# EAGLE board MoxonCircuitBoard_v7 (EAGLE 9.7.0)
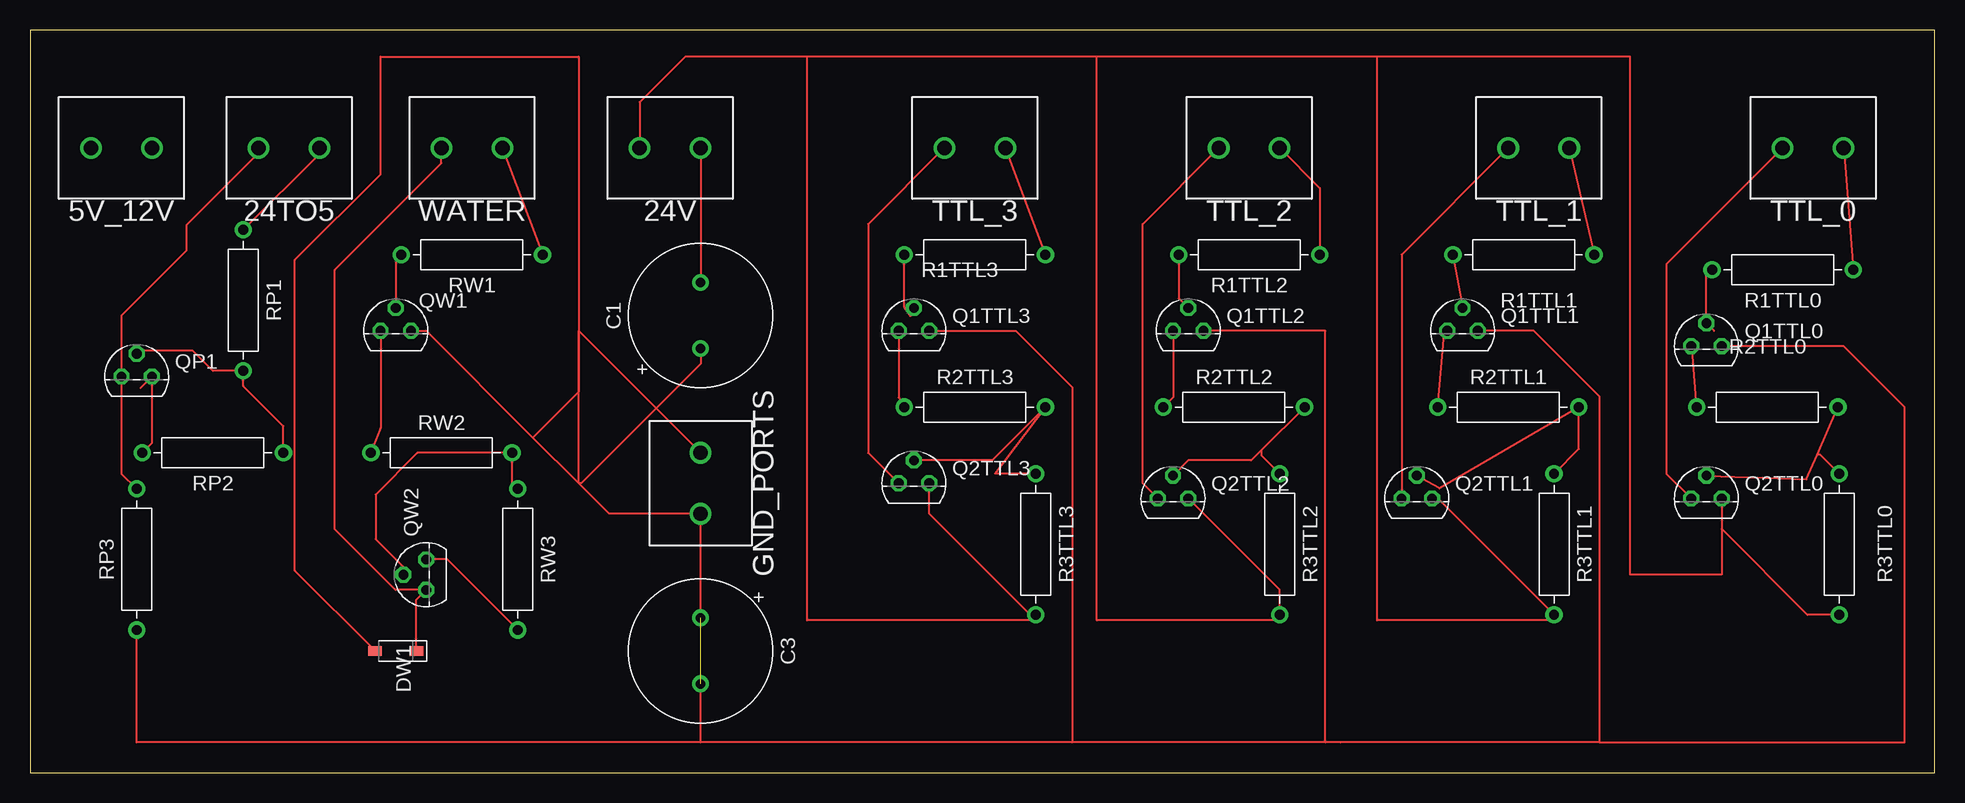
[diagram p0: board, top side]
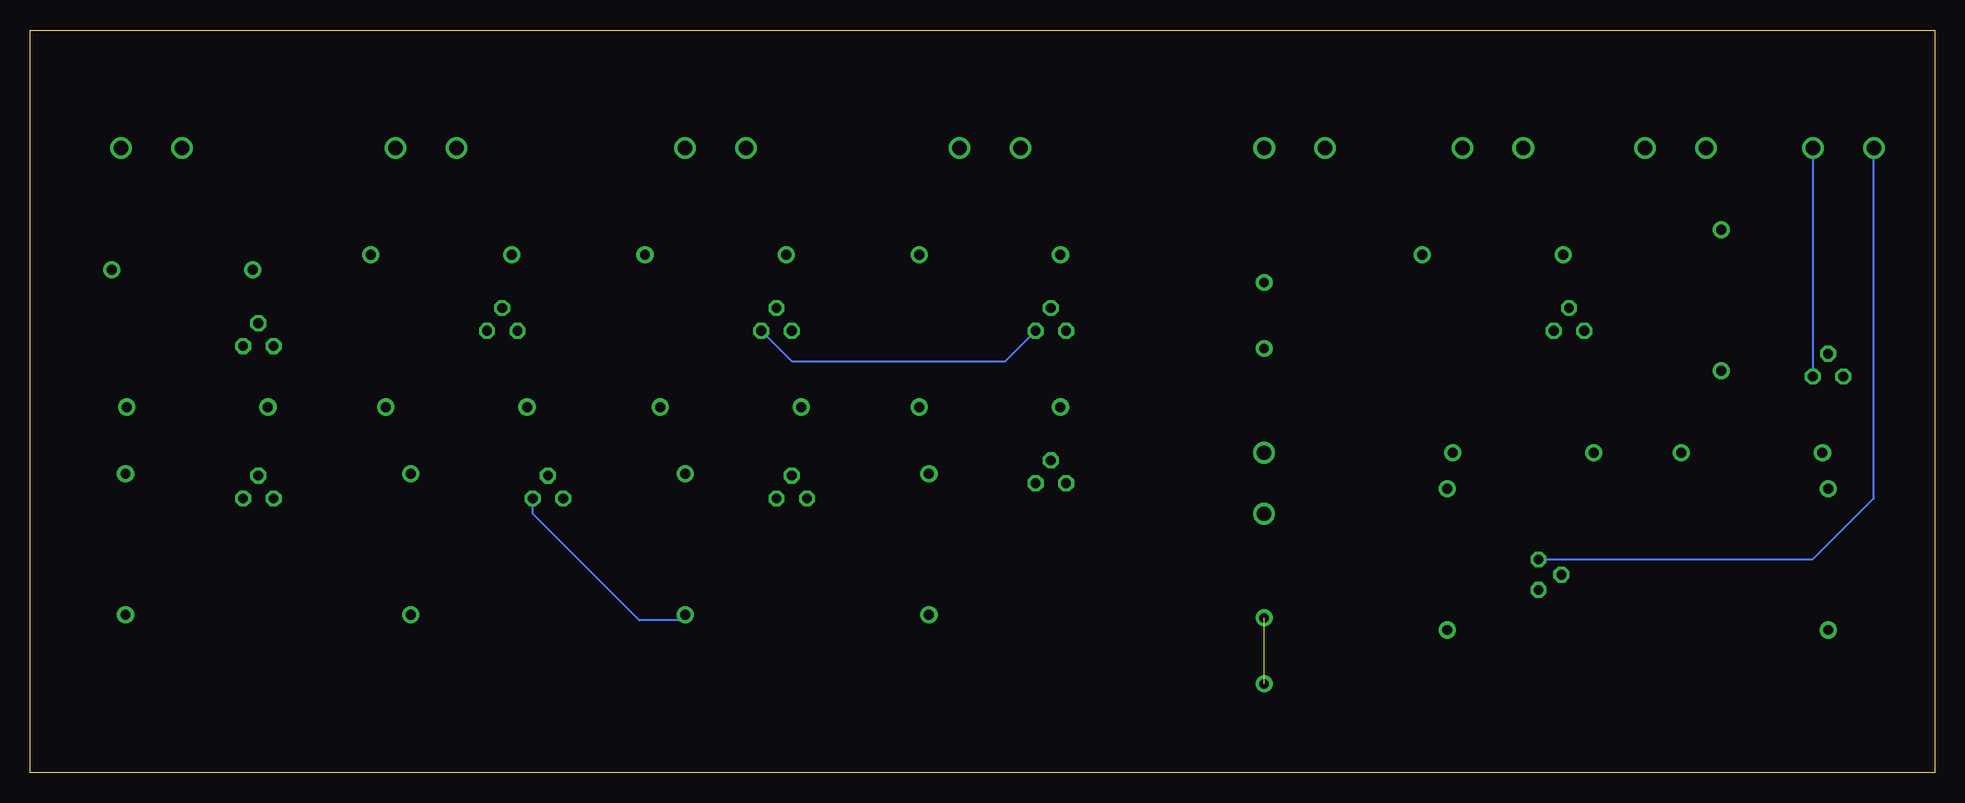
[diagram p1: board, bottom side, seen from below]

Size 158.73 x 61.9 mm. Coordinates in mm from the lower left corner, seen from the top.
Outline: 0,0 158.73,0 158.73,61.9 0,61.9 0,0
Copper layers (1*16): Top 0.035mm / dielectric 1.5mm / Bottom 0.035mm
Design rules "default": minimum track width 6mil, minimum drill 0.35mm, track to track 6mil, track to pad 6mil, pad to pad 6mil, via to via 6mil, smd to smd 6mil, copper to edge 40mil, drill to drill 6mil, minimum pad ring 10mil, minimum via ring 8mil, stop-mask expansion 4mil, vias tented up to drill 0mil, thermal gap 10mil

## Footprints (pad centres in the part's own frame; a part is rotated, then mirrored left to right if it is on the bottom)
TERMBLK_508-2N = drill 1.2: 1 0,0; 2 5.08,0
CAPPRD550W60D1200H2000B = drill 0.8 pad 1.4: 1 -2.75,0; 2 2.75,0
SOD3715X135 = smd 1.127 x 0.784: 1 -1.722,0; 2 1.722,0
TO92 = drill 0.813 octagon: 1 1.27,0; 2 0,1.905; 3 -1.27,0
RESAD1176W63L850D250B = drill 0.83 pad 1.43: 1 -5.88,0; 2 5.88,0

## Placement (x,y rotation side)
5V_12V  1_12V_2_5V  [TERMBLK_508-2N]  5.08,52.07 0 top
24TO5  1_Mout_2_Min  [TERMBLK_508-2N]  19.05,52.07 0 top
24V  1_24V_2_SMPSGround  [TERMBLK_508-2N]  50.8,52.07 0 top
C1  [CAPPRD550W60D1200H2000B]  55.88,38.1 90 top
C3  [CAPPRD550W60D1200H2000B]  55.88,10.16 270 top
DW1  1N4148W  [SOD3715X135]  30.48,10.16 180 top
GND_PORTS  2828XX-2282837-2  [TERMBLK_508-2N]  55.88,21.59 90 top
Q1TTL0  2N3904  [TO92]  139.7,35.56 0 top
Q1TTL1  2N3904  [TO92]  119.38,36.83 0 top
Q1TTL2  2N3904  [TO92]  96.52,36.83 0 top
Q1TTL3  2N3904  [TO92]  73.66,36.83 0 top
Q2TTL0  2N3904  [TO92]  139.7,22.86 0 top
Q2TTL1  2N3904  [TO92]  115.57,22.86 0 top
Q2TTL2  2N3904  [TO92]  95.25,22.86 0 top
Q2TTL3  2N3904  [TO92]  73.66,24.13 0 top
QP1  2N3904  [TO92]  8.89,33.02 0 top
QW1  2N3904  [TO92]  30.48,36.83 0 top
QW2  2N4401  [TO92]  33.02,16.51 90 top
R1TTL0  3.9K_1/4W  [RESAD1176W63L850D250B]  146.05,41.91 180 top
R1TTL1  3.9K_1/4W  [RESAD1176W63L850D250B]  124.46,43.18 180 top
R1TTL2  3.9K_1/4W  [RESAD1176W63L850D250B]  101.6,43.18 180 top
R1TTL3  3.9K_1/4W  [RESAD1176W63L850D250B]  78.74,43.18 180 top
R2TTL0  22K_1/4W  [RESAD1176W63L850D250B]  144.78,30.48 0 top
R2TTL1  22K_1/4W  [RESAD1176W63L850D250B]  123.19,30.48 0 top
R2TTL2  22K_1/4W  [RESAD1176W63L850D250B]  100.33,30.48 0 top
R2TTL3  22K_1/4W  [RESAD1176W63L850D250B]  78.74,30.48 0 top
R3TTL0  1M_1/4W  [RESAD1176W63L850D250B]  150.77,19.05 270 top
R3TTL1  1M_1/4W  [RESAD1176W63L850D250B]  127,19.05 270 top
R3TTL2  1M_1/4W  [RESAD1176W63L850D250B]  104.14,19.05 270 top
R3TTL3  1M_1/4W  [RESAD1176W63L850D250B]  83.82,19.05 270 top
RP1  3.9K_1/4W  [RESAD1176W63L850D250B]  17.78,39.37 270 top
RP2  1M_1/4W  [RESAD1176W63L850D250B]  15.24,26.67 180 top
RP3  1M_1/4W  [RESAD1176W63L850D250B]  8.89,17.78 90 top
RW1  1.2K_1/4W  [RESAD1176W63L850D250B]  36.83,43.18 180 top
RW2  470_1/2W  [RESAD1176W63L850D250B]  34.29,26.67 0 top
RW3  1M_1/4W  [RESAD1176W63L850D250B]  40.64,17.78 270 top
TTL_0  2828XX-2282837-2  [TERMBLK_508-2N]  146.05,52.07 0 top
TTL_1  2828XX-2282837-2  [TERMBLK_508-2N]  123.19,52.07 0 top
TTL_2  2828XX-2282837-2  [TERMBLK_508-2N]  99.06,52.07 0 top
TTL_3  2828XX-2282837-2  [TERMBLK_508-2N]  76.2,52.07 0 top
WATER  2828XX-2282837-2  [TERMBLK_508-2N]  34.29,52.07 0 top

## Library data of the parts
5V_12V 24TO5 24V GND_PORTS TTL_0 TTL_1-TTL_3 WATER = Connector; CATEGORY: Connector; DESCRIPTION: 2 Position Wire to Board Terminal Block Horizontal with Board 5.08 mm Through Hole; MANUFACTURER: TE Connectivity; MPN: 282837-2; OPERATING_TEMPERATURE: -40°C to +105°C; PART_STATUS: ACTIVE; ROHS_COMPLIANCE: RoHS Compliant; SERIES: 282837; SUBCATEGORY: Terminal Block; TYPE: Side Wire Entry
C1 C3 = Capacitor; CATEGORY: Capacitor
DW1 = Diode; CATEGORY: Diode; DESCRIPTION: DIODE GEN PURP 100V 300MA SOD123; MANUFACTURER: Diodes Incorporated; SUB-CATEGORY: Rectifier
Q1TTL0 Q1TTL1-Q1TTL3 Q2TTL0 Q2TTL1-Q2TTL3 QP1 QW1 QW2 = Transistor; CATEGORY: Transistor; SUB-CATEGORY: BJT; TYPE: NPN
R1TTL0 R1TTL1-R1TTL3 R2TTL0 R2TTL1-R2TTL3 R3TTL0 R3TTL1-R3TTL3 RP1-RP3 RW1-RW3 = Resistor; CATEGORY: Resistor; SUB-CATEGORY: Fixed

## Nets
GND: C1.1 C3.1 C3.2 DW1.2 GND_PORTS.1 GND_PORTS.2 Q1TTL0.1 Q1TTL1.1 Q1TTL2.1 Q1TTL3.1 QW1.1 RP3.1
N$1: QP1.2 RP1.2 RP2.1
N$2: 24V.2 C1.2
N$3: 24TO5.1 QP1.3 RP3.2
N$4: 24TO5.2 RP1.1
N$5: QW1.2 RW1.2
N$6: QW1.3 RW2.1
N$7: QW2.2 RW2.2 RW3.1
N$8: 5V_12V.1 QW2.1 RW3.2
N$9: DW1.1 QW2.3 WATER.1
N$10: Q1TTL3.2 R1TTL3.2
N$11: Q1TTL3.3 R2TTL3.1
N$12: Q2TTL3.2 R2TTL3.2 R3TTL3.1
N$13: Q2TTL3.3 TTL_3.1
N$14: Q1TTL2.2 R1TTL2.2
N$15: Q1TTL2.3 R2TTL2.1
N$16: Q2TTL2.2 R2TTL2.2 R3TTL2.1
N$17: R1TTL3.1 TTL_3.2
N$18: Q1TTL1.2 R1TTL1.2
N$19: Q1TTL1.3 R2TTL1.1
N$20: Q2TTL1.2 R2TTL1.2 R3TTL1.1
N$21: R1TTL2.1 TTL_2.2
N$22: Q1TTL0.2 R1TTL0.2
N$23: Q1TTL0.3 R2TTL0.1
N$24: Q2TTL0.2 R2TTL0.2 R3TTL0.1
N$25: 24V.1 Q2TTL0.1 Q2TTL1.1 Q2TTL2.1 Q2TTL3.1 R3TTL0.2 R3TTL1.2 R3TTL2.2 R3TTL3.2
N$26: Q2TTL2.3 TTL_2.1
N$27: R1TTL0.1 TTL_0.2
N$28: Q2TTL0.3 TTL_0.1
N$29: R1TTL1.1 TTL_1.2
N$32: Q2TTL1.3 TTL_1.1
N$33: RW1.1 WATER.2
N$34: 5V_12V.2 QP1.1 RP2.2

## Tracks (layer width: path | path; a pad name or v marks a point on that pad's centre or on a via)
GND  (1 unrouted)
  Top 0.152: Q1TTL0.1 151.13,35.56 156.21,30.48 156.21,2.54 130.81,2.54 | 130.81,2.54 107.95,2.54 107.95,36.83 Q1TTL2.1 | 109.22,2.54 86.83,2.54 | 86.83,2.54 55.88,2.54 | 55.88,2.54 C3.2 | QW1.1 33.02,36.83 41.91,27.94 | 41.91,27.94 45.72,24.13 | GND_PORTS.2 45.72,36.83 45.72,24.13 | 41.91,27.94 45.72,31.75 45.72,59.69 29.21,59.69 29.21,49.9 22.06,42.75 22.06,16.85 DW1.2 | RP3.1 8.89,2.54 55.88,2.54 | C3.1 GND_PORTS.1 48.26,21.59 45.72,24.13 | C1.1 55.88,34.08 45.93,24.13 45.72,24.13 | Q1TTL3.1 82.14,36.83 86.83,32.14 86.83,2.54 | Q1TTL1.1 125.32,36.83 130.81,31.34 130.81,2.54
  Bottom 0.152: Q1TTL2.1 95.25,34.29 77.47,34.29 Q1TTL3.1
N$1
  Top 0.152: RP2.1 21.12,28.88 17.78,32.22 RP1.2 15.24,33.49 13.55,35.18 9.14,35.18 QP1.2
N$2
  Top 0.152: 24V.2 C1.2
N$3
  Top 0.152: RP3.2 7.62,24.93 QP1.3 7.62,38.1 13.03,43.51 13.03,45.64 19.05,51.66 24TO5.1
N$4
  Top 0.152: 24TO5.2 24.13,51.6 RP1.1
N$5
  Top 0.152: RW1.2 30.95,42.82 30.66,42.73 30.48,42.55 QW1.2
N$6
  Top 0.152: QW1.3 29.21,28.74 RW2.1
N$7
  Top 0.152: RW3.1 40.17,24.13 RW2.2 32.28,26.67 28.8,23.19 28.8,19.47 31.44,16.83 QW2.2
N$8
  Top 0.152: RW3.2 34.76,17.78 QW2.1
  Bottom 0.152: 5V_12V.1 5.08,22.87 10.17,17.78 QW2.1
N$9
  Top 0.152: WATER.1 34.29,50.8 25.4,41.91 25.4,20.28 30.44,15.24 QW2.3 32.2,14.42 DW1.1
N$10
  Top 0.152: R1TTL3.2 72.86,38.83 73.39,38.05 Q1TTL3.2
N$11
  Top 0.152: Q1TTL3.3 72.39,31.28 R2TTL3.1
N$12
  Top 0.152: R3TTL3.1 80.4,24.93 R2TTL3.2 80.17,26.03 Q2TTL3.2
N$13
  Top 0.152: TTL_3.1 69.85,45.72 69.85,26.67 Q2TTL3.3
N$14
  Top 0.152: R1TTL2.2 95.72,39.53 Q1TTL2.2
N$15
  Top 0.152: Q1TTL2.3 95.25,31.28 R2TTL2.1
N$16
  Top 0.152: 104.74,25 R3TTL2.1 102.64,26.43 102.64,26.91 | 102.64,26.91 101.77,26.03 96.52,26.03 Q2TTL2.2 | 102.64,26.91 R2TTL2.2
N$17
  Top 0.152: TTL_3.2 R1TTL3.1
N$18
  Top 0.152: R1TTL1.2 119.39,38.72 Q1TTL1.2
N$19
  Top 0.152: Q1TTL1.3 117.86,36.58 R2TTL1.1
N$20
  Top 0.152: R3TTL1.1 129.07,27 R2TTL1.2 117.47,23.7 Q2TTL1.2
N$21
  Top 0.152: TTL_2.2 107.48,48.73 R1TTL2.1
N$22
  Top 0.152: 140.35,36.82 Q1TTL0.2 139.7,41.44 R1TTL0.2
N$23
  Top 0.152: Q1TTL0.3 138.56,34.77 R2TTL0.1
N$24
  Top 0.152: Q2TTL0.2 148.03,24.46 148.93,26.52 | 148.93,26.52 R2TTL0.2 | R3TTL0.1 149.18,26.52 148.93,26.52
N$25
  Top 0.152: Q2TTL1.1 117.31,22.86 R3TTL1.2 127,12.7 112.23,12.7 112.23,59.69 133.35,59.69 133.35,16.51 140.97,16.51 140.97,20.32 | 113.03,59.69 88.9,59.69 | 88.9,59.69 64.77,59.69 | 64.77,59.69 54.61,59.69 50.8,55.88 24V.1 | Q2TTL2.1 104.14,15.24 R3TTL2.2 104.14,12.7 88.9,12.7 88.9,59.69 | Q2TTL3.1 74.93,21.59 83.35,13.17 R3TTL3.2 83.82,12.7 64.77,12.7 64.77,59.69 | Q2TTL0.1 140.97,20.32 | R3TTL0.2 148.12,13.17 140.97,20.32
  Bottom 0.152: R3TTL2.2 104.61,12.7 107.95,12.7 116.84,21.59 Q2TTL1.1
N$26
  Top 0.152: TTL_2.1 92.71,45.72 92.71,24.13 Q2TTL2.3
N$27
  Top 0.152: TTL_0.2 R1TTL0.1
N$28
  Top 0.152: TTL_0.1 136.36,42.38 136.36,24.93 Q2TTL0.3
N$29
  Top 0.152: TTL_1.2 R1TTL1.1
N$32
  Top 0.152: TTL_1.1 114.3,43.18 Q2TTL1.3
N$33
  Top 0.152: WATER.2 RW1.1
N$34
  Top 0.152: 9.22,32.08 QP1.1 10.16,27.47 RP2.2
  Bottom 0.152: 5V_12V.2 QP1.1